# Altium PCB SWD adapter.PcbDoc
Units mm, origin at the board's own origin, x right, y up, seen from the top; angles counter-clockwise.
Board outline 15 x 27 mm, 2 copper layers (Top Layer, Bottom Layer); 3 components, 7 nets, 34 pads, 0 vias.
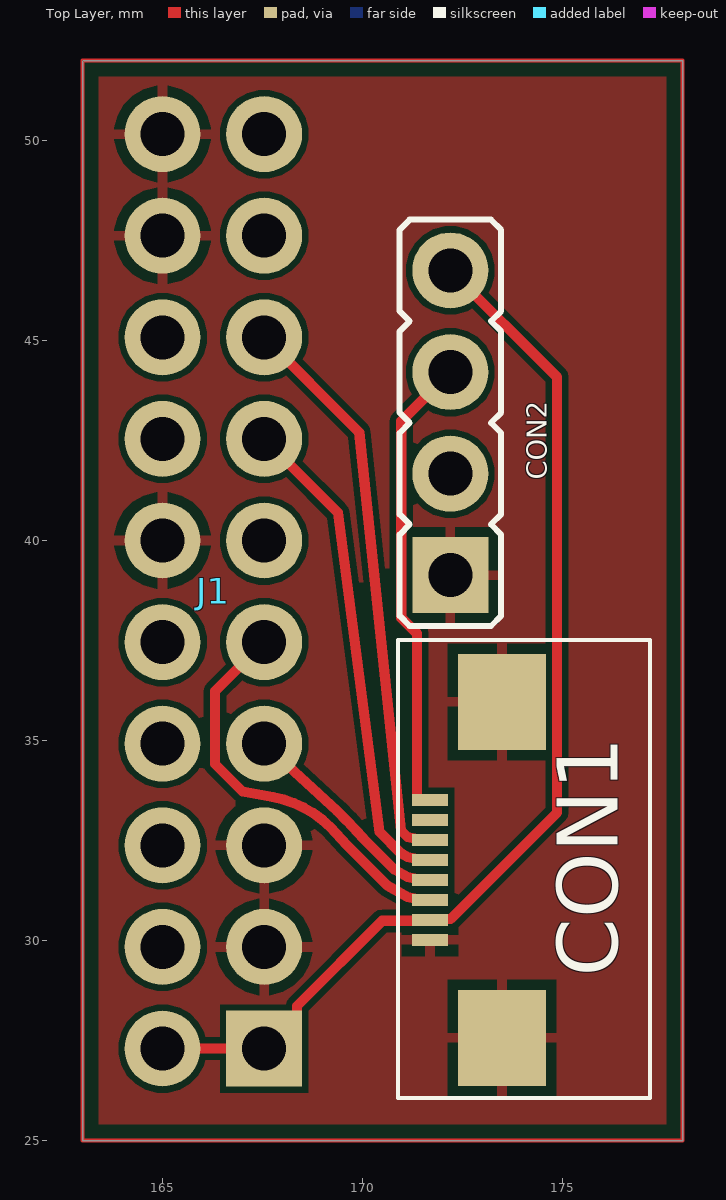
[diagram p0: Top Layer view]
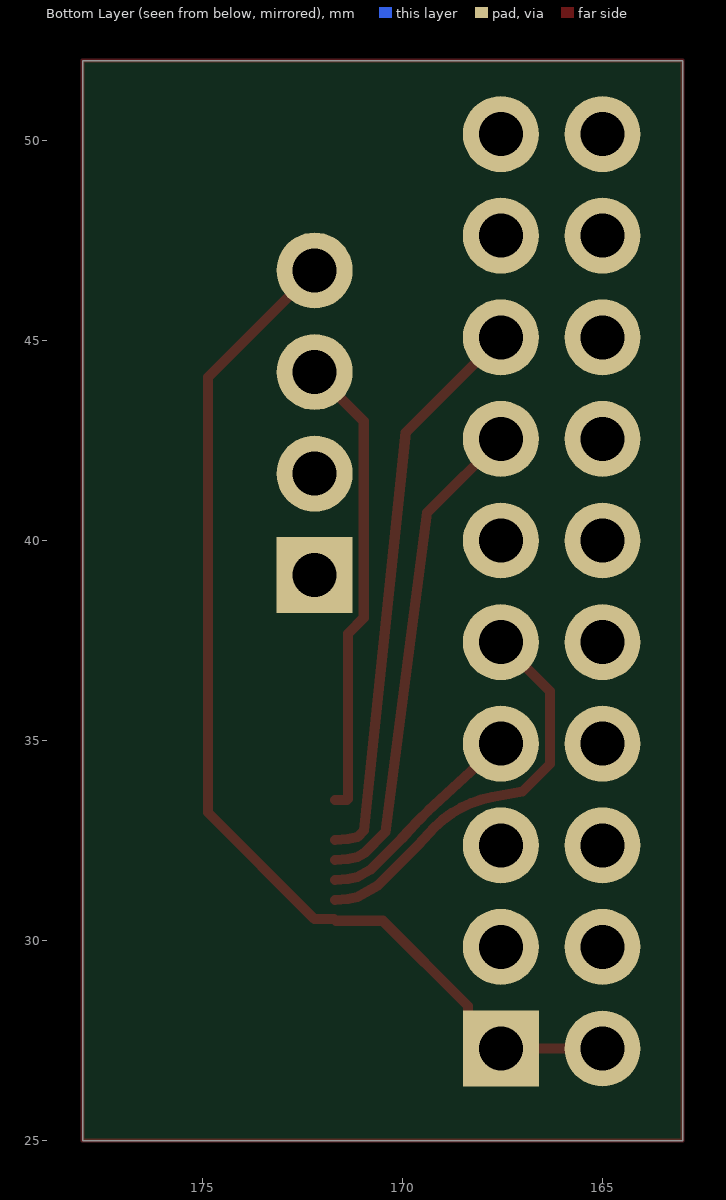
[diagram p1: Bottom Layer view, seen from below]

## Layer stack, top to bottom
Top Solder: solder mask 0.0102, Solder Resist, Dk 3.5
Top Layer: signal copper 0.0356
Dielectric 1: dielectric 0.32, FR-4, Dk 4.8
Bottom Layer: signal copper 0.0356
Bottom Solder: solder mask 0.0102, Solder Resist, Dk 3.5

## Board outline
163,25 163,52 178,52 178,25

## Design rules (kind name [scope] priority, off if disabled: settings)
BoardOutlineClearance [Not OnLayer('Flex Top Overlay 1') and not OnLayer('Flex Bottom Overlay 1') and not OnLayer('Bottom Overlay') and not OnLayer ('Top Overlay')] p1: gap=0.4 ignorepadtopadclearanceinfootprint=FALSE except(0: Arc-SplitContinuation Track-SplitContinuation SMDPad-SplitContinuation THPad-SplitContinuation Via-SplitContinuation Fill-SplitContinuation Poly-SplitContinuation Region-SplitContinuation Text-OutlineEdge Text-CavityEdge Text-CutoutEdge Text-SplitBarrior Text-SplitContinuation; 0.254: Arc-CavityEdge Arc-SplitBarrior Track-CavityEdge Track-SplitBarrior SMDPad-CavityEdge SMDPad-SplitBarrior THPad-CavityEdge THPad-SplitBarrior Via-CavityEdge Via-SplitBarrior Fill-CavityEdge Fill-SplitBarrior Poly-CavityEdge Poly-SplitBarrior Region-CavityEdge Region-SplitBarrior)
Clearance [All] p1: gap=0.15 ignorepadtopadclearanceinfootprint=FALSE except(0: Fill-Hole Poly-Hole Region-Hole Text-Hole; 0.3: Arc-Hole Track-Hole SMDPad-Hole THPad-Hole Via-Hole)
HoleSize [All] p1: absolutevalues=TRUE maxlimit=10 minlimit=0.2 maxpercent=80.000 minpercent=20.000
HoleToHoleClearance [All] p1: gap=0.152 allowstackedmicrovias=TRUE
MinimumAnnularRing [All] p1: minimumring=0.1
MinimumSolderMaskSliver [All] p1: minsoldermaskwidth=0
PlaneClearance [All] p1: clearance=0.254
PlaneConnect [All] p1: pad.planeconnectstyle=Relief pad.reliefexpansion=0.254 pad.reliefentries=4 pad.reliefconductorwidth=0.254 pad.reliefairgap=0.254 via.planeconnectstyle=Direct via.reliefexpansion=0.508 via.reliefentries=4 via.reliefconductorwidth=0.254 via.reliefairgap=0.254
PolygonConnect [All] p1: thpad.connectstyle=Relief thpad.reliefconductorwidth=0.254 thpad.reliefentries=4 thpad.polygonreliefangle="90 Angle" thpad.airgapwidth=0.254 smdpad.connectstyle=Relief smdpad.reliefconductorwidth=0.254 smdpad.reliefentries=4 smdpad.polygonreliefangle="90 Angle" smdpad.airgapwidth=0.254 via.connectstyle=Direct via.reliefconductorwidth=0.254 via.reliefentries=4 via.polygonreliefangle="90 Angle" via.airgapwidth=0.254
RoutingVias [All] p1: holewidth=0.2 width=0.5 viastyle="Through Hole" minholewidth=0.2 minwidth=0.5 maxholewidth=1 maxwidth=2
SilkToSilkClearance [All] p1: silktosilkclearance=0
SilkToSolderMaskClearance [IsPad] p1: minsilkscreentomaskgap=0 clearancetoexposedcopper=TRUE
SolderMaskExpansion [All] p1: expansion=0.102 istentingtop=FALSE
UnRoutedNet [All] p1: checkbadconnections=TRUE
Width [All] p1: maxlimit=0.6 minlimit=0.2 preferedwidth=0.2 minimp=50.000000 maximp=50.000000 favimp=50.000000
22 further rules are at their usual default settings.

## Components (designator, comment, footprint, x,y, rotation, side; value= is the part's Value field where it differs from the comment)
CON1 "54548-0871" 54548-0871 171.688,31.766 r90 top
CON2 "M20-9990445" M20-9990445 172.196,42.942 r90 top
J1 "87834-2019" 87834-2019 167.54,29.84 r90 top

## Footprints (in the part's own frame and the unit in brackets; to place one, negate y for a bottom-side part, rotate by r counter-clockwise, add the part's x,y. Pads: shape width x height; smd on the part's side, far side on the other; paste and mask are expansions set on the pad)
54548-0871 [mm]
  rect 0.3x0.9 smd: 1(-1.75,0) 2(-1.25,0) 3(-0.75,0) 4(-0.25,0) 5(0.25,0) 6(0.75,0) 7(1.25,0) 8(1.75,0)
  rect 2.4x2.2 smd: M1(-4.2,-1.8) M2(4.2,-1.8)
  silkscreen extent -5.7,-5.5 5.75,0.8, body extent -4.6,-4.8 4.6,0.2, height 1.18
87834-2019 [mm]
  rect 1.9x1.9 hole 1.1: 1(-2.54,0)
  round 1.9 hole 1.1: 2(-2.54,2.54) 3(0,0) 4(0,2.54) 5(2.54,0) 6(2.54,2.54) 7(5.08,0) 8(5.08,2.54) 9(7.62,0) 10(7.62,2.54) 11(10.16,0) 12(10.16,2.54) 13(12.7,0) 14(12.7,2.54) 15(15.24,0) 16(15.24,2.54) 17(17.78,0) 18(17.78,2.54) 19(20.32,0) 20(20.32,2.54)
M20-9990445 [mm]
  rect 1.9x1.9 hole 1.1: 1(-3.81,0)
  round 1.9 hole 1.1: 2(-1.27,0) 3(1.27,0) 4(3.81,0)
  silkscreen extent -5.08,-1.27 5.08,1.27, body extent -5.08,-1.27 5.08,1.27, height 8.64

## Part data
CON1: "Connecteur FFC/FPC, Right-Angle, Surface Mount, ZIF, Bottom Contact / Style, 30 Circuits", Fabricant=MOLEX, Référence=54548-0871
CON2: "4 pins RA 2.54mm droit", Fabricant=Harwin, Référence=M20-9990445
J1: "Embase PCB, 2.54mm,20 contacts, 2 rangées, traversant", Fabricant=molex, RefSupplier=538-87834-2019, Référence=87834-2019, Supplier=mouser

## Nets (pads, with @x,y where several pads share a name; then routed paths per layer and width w, separated by ;. In a path a pad name is that pad's centre, name@x,y a point inside that pad or via, vN(x,y) a via of type N, cw(c..) or ccw(c..) an arc to the next point about the centre after c; other vN are vias at no path point)
3V: CON1.2 CON2.4 J1.1 J1.2 | length 27.1
  Top Layer w0.254: J1.2 J1.1 168.363,28.123 168.363,28.363 170.493,30.493 171.665,30.493 CON1.2 171.711,30.539 172.203,30.539 174.865,33.201 174.865,44.083 CON2.4
GND: CON1.1 CON1.M1 CON1.M2 CON2.1 J1.3 J1.5 J1.12 J1.18 J1.20
SWD_CLK: CON1.3 J1.9 | length 10.1
  Top Layer w0.254: J1.9 166.313,36.233 166.313,34.412 167,33.724 167.758,33.588 cw(c167.276,30.913) 169.197,32.835 169.622,32.377 170.621,31.377 171.123,31.089 171.365,31.039 CON1.3
SWD_DIO: CON1.4 J1.7 | length 5.5
  Top Layer w0.254: J1.7 169.361,33.242 169.365,33.239 169.607,32.997 170.026,32.544 170.789,31.781 171.123,31.589 171.365,31.539 CON1.4
SWD_SWO: CON1.5 J1.13 | length 12.2
  Top Layer w0.254: J1.13 169.326,40.754 169.387,40.693 170.43,32.711 170.956,32.185 171.123,32.089 171.365,32.039 CON1.5
UART_TX: CON1.8 CON2.3 | length 11.7
  Top Layer w0.254: CON1.8 171.388,33.516 171.365,33.539 171.365,37.671 170.969,38.067 170.969,42.985 CON2.3
UC_NRST: CON1.6 J1.15 | length 14.2
  Top Layer w0.254: J1.15 169.844,42.776 169.918,42.702 170.961,32.751 171.123,32.589 171.365,32.539 CON1.6
pads on no net: CON1.7 CON2.2 J1.4 J1.6 J1.8 J1.10 J1.11 J1.14 J1.16 J1.17 J1.19
copper on no net: | length 84
  Top Layer w0.1: 163,25 178,25 178,52 163,52 163,25

## Polygon pours and split planes (outlines as drawn)
GND on Top Layer "NONET_L-01_P-001" (solid, pour order 0): 163,53 163,25 178,25 178,53